# EAGLE board Differential driver (EAGLE 7.6.0)
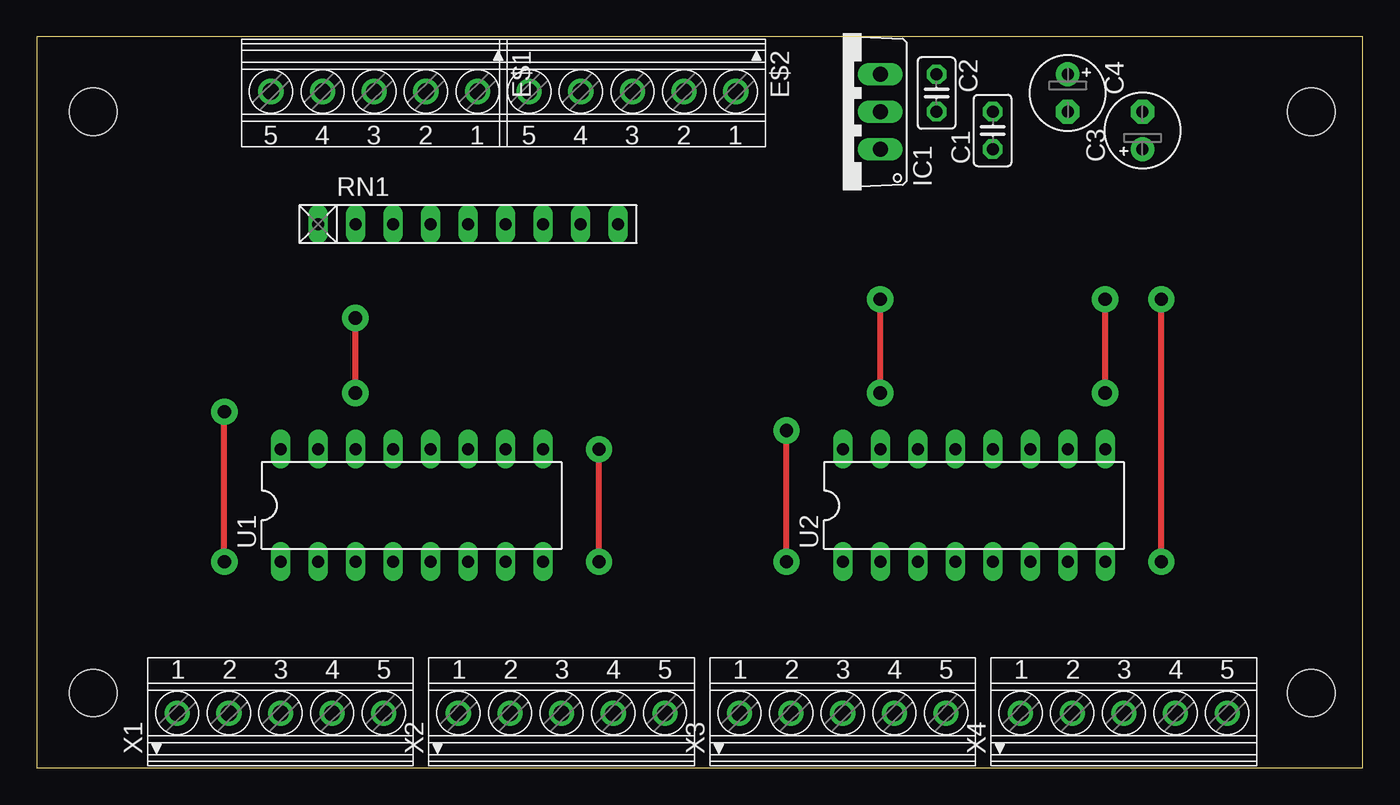
[diagram p0: board, top side]
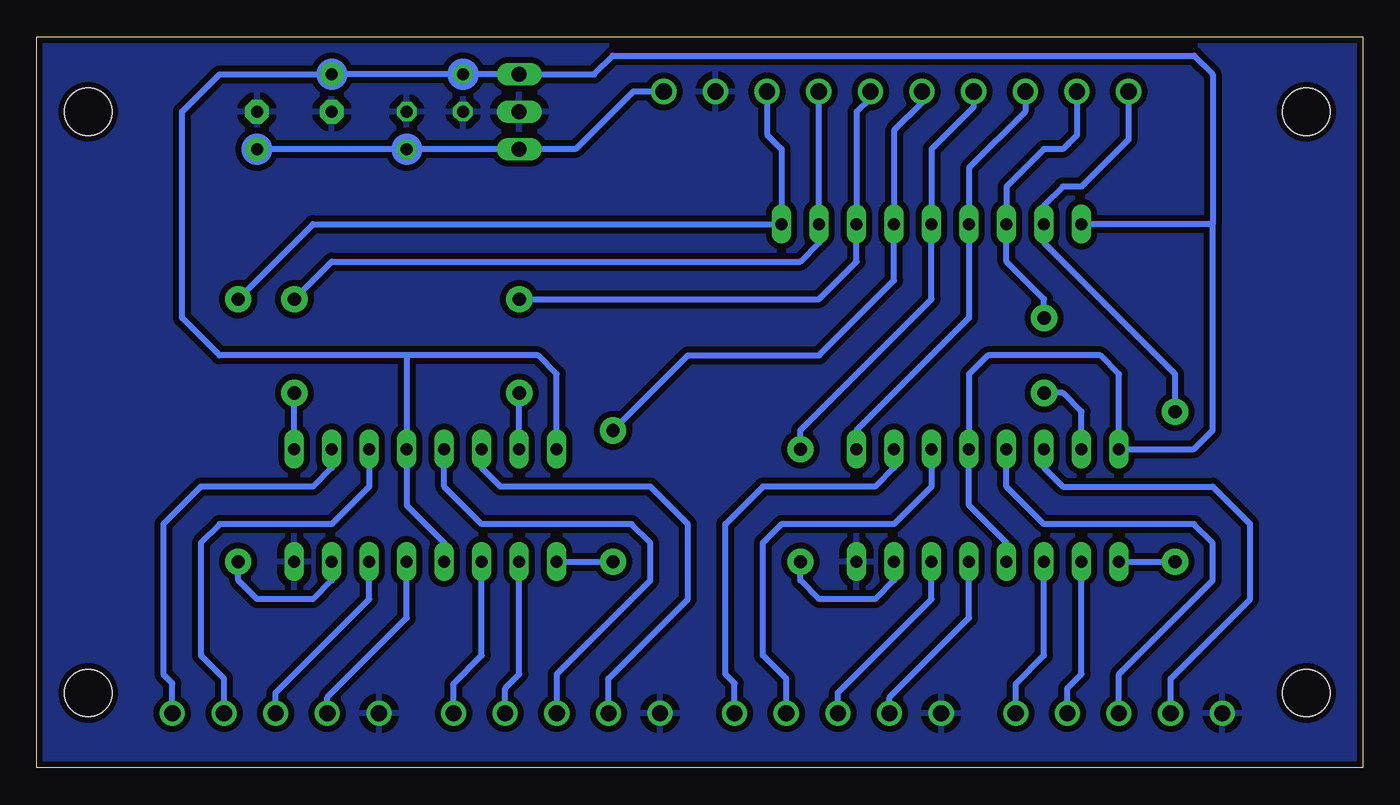
[diagram p1: board, bottom side, seen from below]

Size 89.84 x 49.52 mm. Coordinates in mm from the lower left corner, seen from the top.
Outline: 0,0 89.84,0 89.84,49.52 0,49.52 0,0
Copper layers (1*16): Top 0.035mm / dielectric 1.5mm / Bottom 0.035mm
Design rules "default *": minimum track width 20mil, minimum drill 24mil, track to track 16mil, track to pad 16mil, pad to pad 20mil, via to via 20mil, smd to smd 8mil, copper to edge 16mil, drill to drill 8mil, minimum pad ring 10mil, minimum via ring 8mil, stop-mask expansion 4mil, vias tented up to drill 0mil, thermal gap 20mil
Holes 3.2 mm at 3.81,5.08 86.36,5.08 86.36,44.45 3.81,44.45

## Footprints (pad centres in the part's own frame; a part is rotated, then mirrored left to right if it is on the bottom)
C025-025X050 = drill 0.813 octagon: 1 -1.27,0; 2 1.27,0
E2,5-5 = drill 0.813 pad 1.6: + -1.27,0 | drill 0.813 pad 1.6 octagon: - 1.27,0
1751277 = drill 1.1 pad 1.7: 1 -7,-0.1; 2 -3.5,-0.1; 3 0,-0.1; 4 3.5,-0.1; 5 7,-0.1
TO220V = drill 1.016 long: 1 -2.54,-2.54; 2 0,-2.54; 3 2.54,-2.54
RN-9 = drill 0.813 long: 1 -10.16,0; 2 -7.62,0; 3 -5.08,0; 4 -2.54,0; 5 0,0; 6 2.54,0; 7 5.08,0; 8 7.62,0; 9 10.16,0
DIL16 = drill 0.813 long: 1 -8.89,-3.81; 2 -6.35,-3.81; 3 -3.81,-3.81; 4 -1.27,-3.81; 5 1.27,-3.81; 6 3.81,-3.81; 7 6.35,-3.81; 8 8.89,-3.81; 9 8.89,3.81; 10 6.35,3.81; 11 3.81,3.81; 12 1.27,3.81; 13 -1.27,3.81; 14 -3.81,3.81; 15 -6.35,3.81; 16 -8.89,3.81

## Placement (x,y rotation side)
C1  [C025-025X050]  64.77,43.18 90 top
C2  [C025-025X050]  60.96,45.72 270 top
C3  [E2,5-5]  69.85,45.72 270 top
C4  [E2,5-5]  74.93,43.18 90 top
E$1  [1751277]  22.86,45.72 180 top
E$2  [1751277]  40.36,45.72 180 top
IC1  7805TV  [TO220V]  54.61,44.45 90 top
RN1  [RN-9]  29.21,36.83 0 top
U1  SN75174N  [DIL16]  25.4,17.78 0 top
U2  SN75174N  [DIL16]  63.5,17.78 0 top
X1  [1751277]  16.51,3.81 0 top
X2  [1751277]  35.56,3.81 0 top
X3  [1751277]  54.61,3.81 0 top
X4  [1751277]  73.66,3.81 0 top

## Library data of the parts
C1-C4 = rcl
E$1 E$2 = con-phoenix-350
IC1 = linear
RN1 = resistor-net; OC_FARNELL: unknown; OC_NEWARK: unknown
U1 U2 = texas; MPN: SN75174N; OC_FARNELL: 1106026; OC_NEWARK: 60K6927; PACKAGE: PDIP-16; SUPPLIER: Texas Instruments
X1-X4 = con-phoenix-350; OC_FARNELL: unknown; OC_NEWARK: unknown

## Nets
+5V: C2.1 C3.+ IC1.3 RN1.1 U1.4 U1.12 U1.16 U2.4 U2.12 U2.16
+24V: C1.1 C4.+ E$2.1 IC1.1
A_DIR: E$2.3 RN1.9 U2.7
A_DIR+: U2.6 X4.3
A_DIR-: U2.5 X4.2
A_STEP: E$2.4 RN1.8 U2.9
A_STEP+: U2.10 X4.5
A_STEP-: U2.11 X4.4
GND: C1.2 C2.2 C3.- C4.- E$2.2 IC1.2 U1.8 U2.8 X1.1 X2.1 X3.1 X4.1
X_DIR: E$1.4 RN1.3 U1.15
X_DIR+: U1.14 X1.2
X_DIR-: U1.13 X1.3
X_STEP: E$1.5 RN1.2 U1.1
X_STEP+: U1.2 X1.4
X_STEP-: U1.3 X1.5
Y_DIR: E$1.2 RN1.5 U1.7
Y_DIR+: U1.6 X2.3
Y_DIR-: U1.5 X2.2
Y_STEP: E$1.3 RN1.4 U1.9
Y_STEP+: U1.10 X2.5
Y_STEP-: U1.11 X2.4
Z_DIR: E$2.5 RN1.7 U2.15
Z_DIR+: U2.14 X3.2
Z_DIR-: U2.13 X3.3
Z_STEP: E$1.1 RN1.6 U2.1
Z_STEP+: U2.2 X3.4
Z_STEP-: U2.3 X3.5

## Tracks (layer width: path | path; a pad name or v marks a point on that pad's centre or on a via)
+5V
  Bottom 0.406: U1.4 24.13,15.24 26.67,17.78 U1.12 26.67,26.67 25.4,27.94 17.78,27.94 16.51,26.67 U1.16 11.43,21.59 10.16,22.86 10.16,36.83 | 10.16,36.83 RN1.1 | 10.16,36.83 10.16,46.99 11.43,48.26 50.8,48.26 52.07,46.99 IC1.3 C2.1 C3.+ 77.47,46.99 80.01,44.45 80.01,30.48 77.47,27.94 64.77,27.94 | U2.4 62.23,15.24 64.77,17.78 U2.12 64.77,27.94 | U2.16 54.61,26.67 55.88,27.94 64.77,27.94
+24V
  Bottom 0.406: C4.+ C1.1 IC1.1 53.34,41.91 49.43,45.82 E$2.1
A_DIR  (via drill 0.8 pad 1.78, 0.9 pad 1.68)
  Top 0.406: v76.2,13.97 v76.2,31.75
  Bottom 0.406: U2.7 69.85,12.7 71.12,11.43 74.93,11.43 76.2,12.7 v76.2,13.97 | v76.2,31.75 71.12,36.83 RN1.9 39.37,41.91 40.36,42.9 E$2.3
A_DIR+
  Bottom 0.406: X4.3 73.66,5.08 67.31,11.43 U2.6
A_DIR-
  Bottom 0.406: X4.2 70.16,4.77 64.77,10.16 U2.5
A_STEP  (via drill 0.8 pad 1.78, 0.9 pad 1.78)
  Top 0.406: v72.39,25.4 v72.39,31.75
  Bottom 0.406: v72.39,31.75 69.85,34.29 38.1,34.29 36.83,35.56 RN1.8 36.86,36.86 E$2.4 | U2.9 v72.39,25.4
A_STEP+
  Bottom 0.406: U2.10 69.85,20.32 71.12,19.05 78.74,19.05 81.28,16.51 81.28,6.35 80.66,5.73 X4.5
A_STEP-
  Bottom 0.406: U2.11 67.31,19.05 69.85,16.51 77.47,16.51 78.74,15.24 78.74,7.62 77.16,6.04 X4.4
GND
  pour Bottom: 0,49.53 90.17,49.53 90.17,0 0,0
X_DIR  (via drill 0.8 pad 1.78, 0.9 pad 1.68)
  Top 0.406: v21.59,25.4 v21.59,30.48
  Bottom 0.406: U1.15 19.05,24.13 20.32,25.4 v21.59,25.4 | v21.59,30.48 21.59,31.75 24.13,34.29 RN1.3 24.13,39.37 21.59,41.91 20.32,41.91 19.36,42.87 E$1.4
X_DIR+
  Bottom 0.406: U1.14 21.59,20.32 20.32,19.05 10.16,19.05 7.62,16.51 7.62,11.43 13.01,6.04 X1.2
X_DIR-
  Bottom 0.406: U1.13 24.13,19.05 21.59,16.51 11.43,16.51 10.16,15.24 10.16,12.7 16.51,6.35 X1.3
X_STEP  (via drill 0.8 pad 1.78, 0.9 pad 1.68)
  Top 0.406: v12.7,13.97 v12.7,24.13
  Bottom 0.406: U1.1 v12.7,13.97 | v12.7,24.13 12.7,26.67 21.59,35.56 RN1.2 21.59,38.1 20.32,39.37 19.05,39.37 15.86,42.56 E$1.5
X_STEP+
  Bottom 0.406: X1.4 20.01,5.39 19.05,6.35 U1.2
X_STEP-
  Bottom 0.406: X1.5 23.51,5.7 21.59,7.62 U1.3
Y_DIR  (via drill 0.8 pad 1.78, 0.9 pad 1.68)
  Top 0.406: v38.1,13.97 v38.1,21.59
  Bottom 0.406: U1.7 31.75,12.7 33.02,11.43 36.83,11.43 38.1,12.7 v38.1,13.97 | v38.1,21.59 38.1,22.86 29.21,31.75 RN1.5 29.21,41.91 26.36,44.76 E$1.2
Y_DIR+
  Bottom 0.406: X2.3 35.56,5.08 29.21,11.43 U1.6
Y_DIR-
  Bottom 0.406: X2.2 32.06,4.77 26.67,10.16 U1.5
Y_STEP
  Bottom 0.406: U1.9 34.29,22.86 26.67,30.48 RN1.4 26.67,40.64 22.86,44.45 E$1.3
Y_STEP+
  Bottom 0.406: U1.10 31.75,20.32 33.02,19.05 40.64,19.05 43.18,16.51 43.18,6.35 42.56,5.73 X2.5
Y_STEP-
  Bottom 0.406: U1.11 29.21,19.05 31.75,16.51 39.37,16.51 40.64,15.24 40.64,7.62 39.06,6.04 X2.4
Z_DIR  (via drill 0.8 pad 1.78, 0.9 pad 1.78)
  Top 0.406: v57.15,25.4 v57.15,31.75
  Bottom 0.406: U2.15 v57.15,25.4 | v57.15,31.75 36.83,31.75 34.29,34.29 RN1.7 34.29,44.45 33.36,45.38 E$2.5
Z_DIR+
  Bottom 0.406: U2.14 59.69,20.32 58.42,19.05 48.26,19.05 45.72,16.51 45.72,11.43 51.11,6.04 X3.2
Z_DIR-
  Bottom 0.406: U2.13 62.23,19.05 59.69,16.51 49.53,16.51 48.26,15.24 48.26,12.7 54.61,6.35 X3.3
Z_STEP  (via drill 0.8 pad 1.78, 0.9 pad 1.68)
  Top 0.406: v50.8,13.97 v50.8,22.86
  Bottom 0.406: U2.1 v50.8,13.97 | v50.8,22.86 45.72,27.94 36.83,27.94 31.75,33.02 RN1.6 31.75,43.18 29.86,45.07 E$1.1
Z_STEP+
  Bottom 0.406: X3.4 58.11,5.39 57.15,6.35 U2.2
Z_STEP-
  Bottom 0.406: X3.5 61.61,5.7 59.69,7.62 U2.3
(copper drawn outside any net)
  shapes: Bottom circle x4